# Altium PCB Pannelisation_sept2017.PcbDoc
Units mil, origin at the board's own origin, x right, y up, seen from the top; angles counter-clockwise.
Board outline 5545 x 5090 mil, 2 copper layers (Top Layer, Bottom Layer); 210 components, 0 nets, 636 pads, 139 vias.
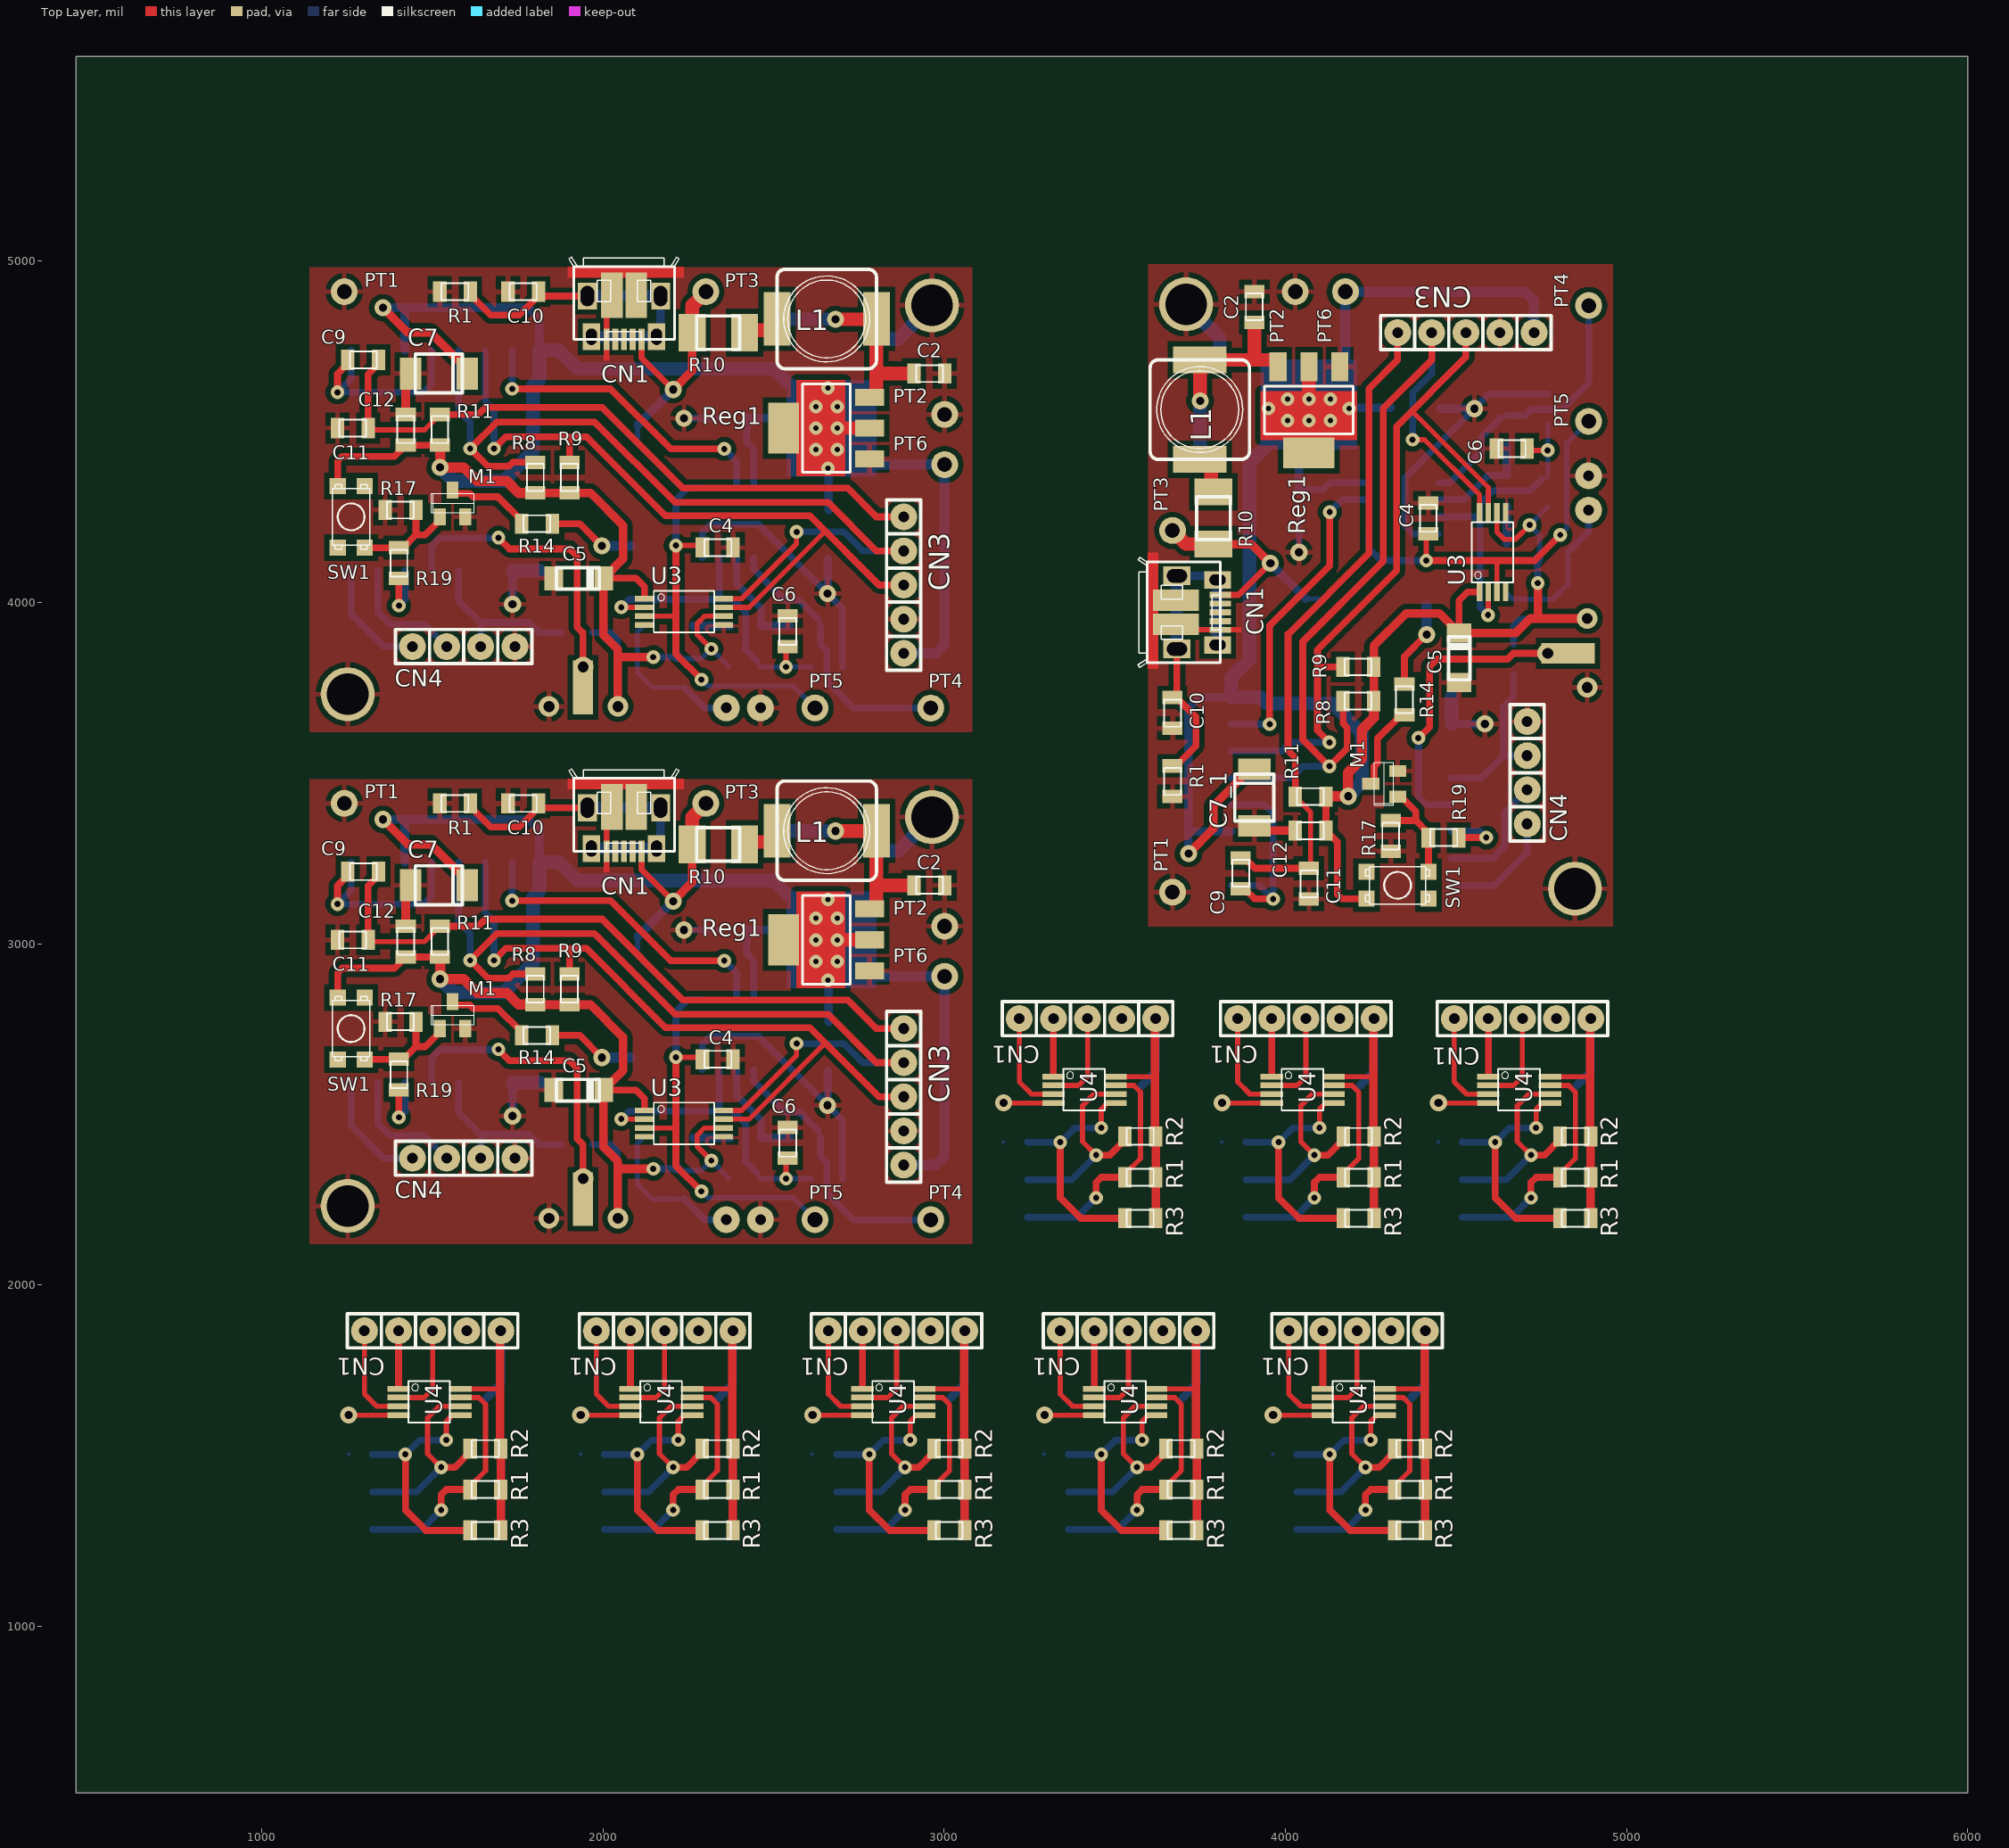
[diagram p0: Top Layer view]
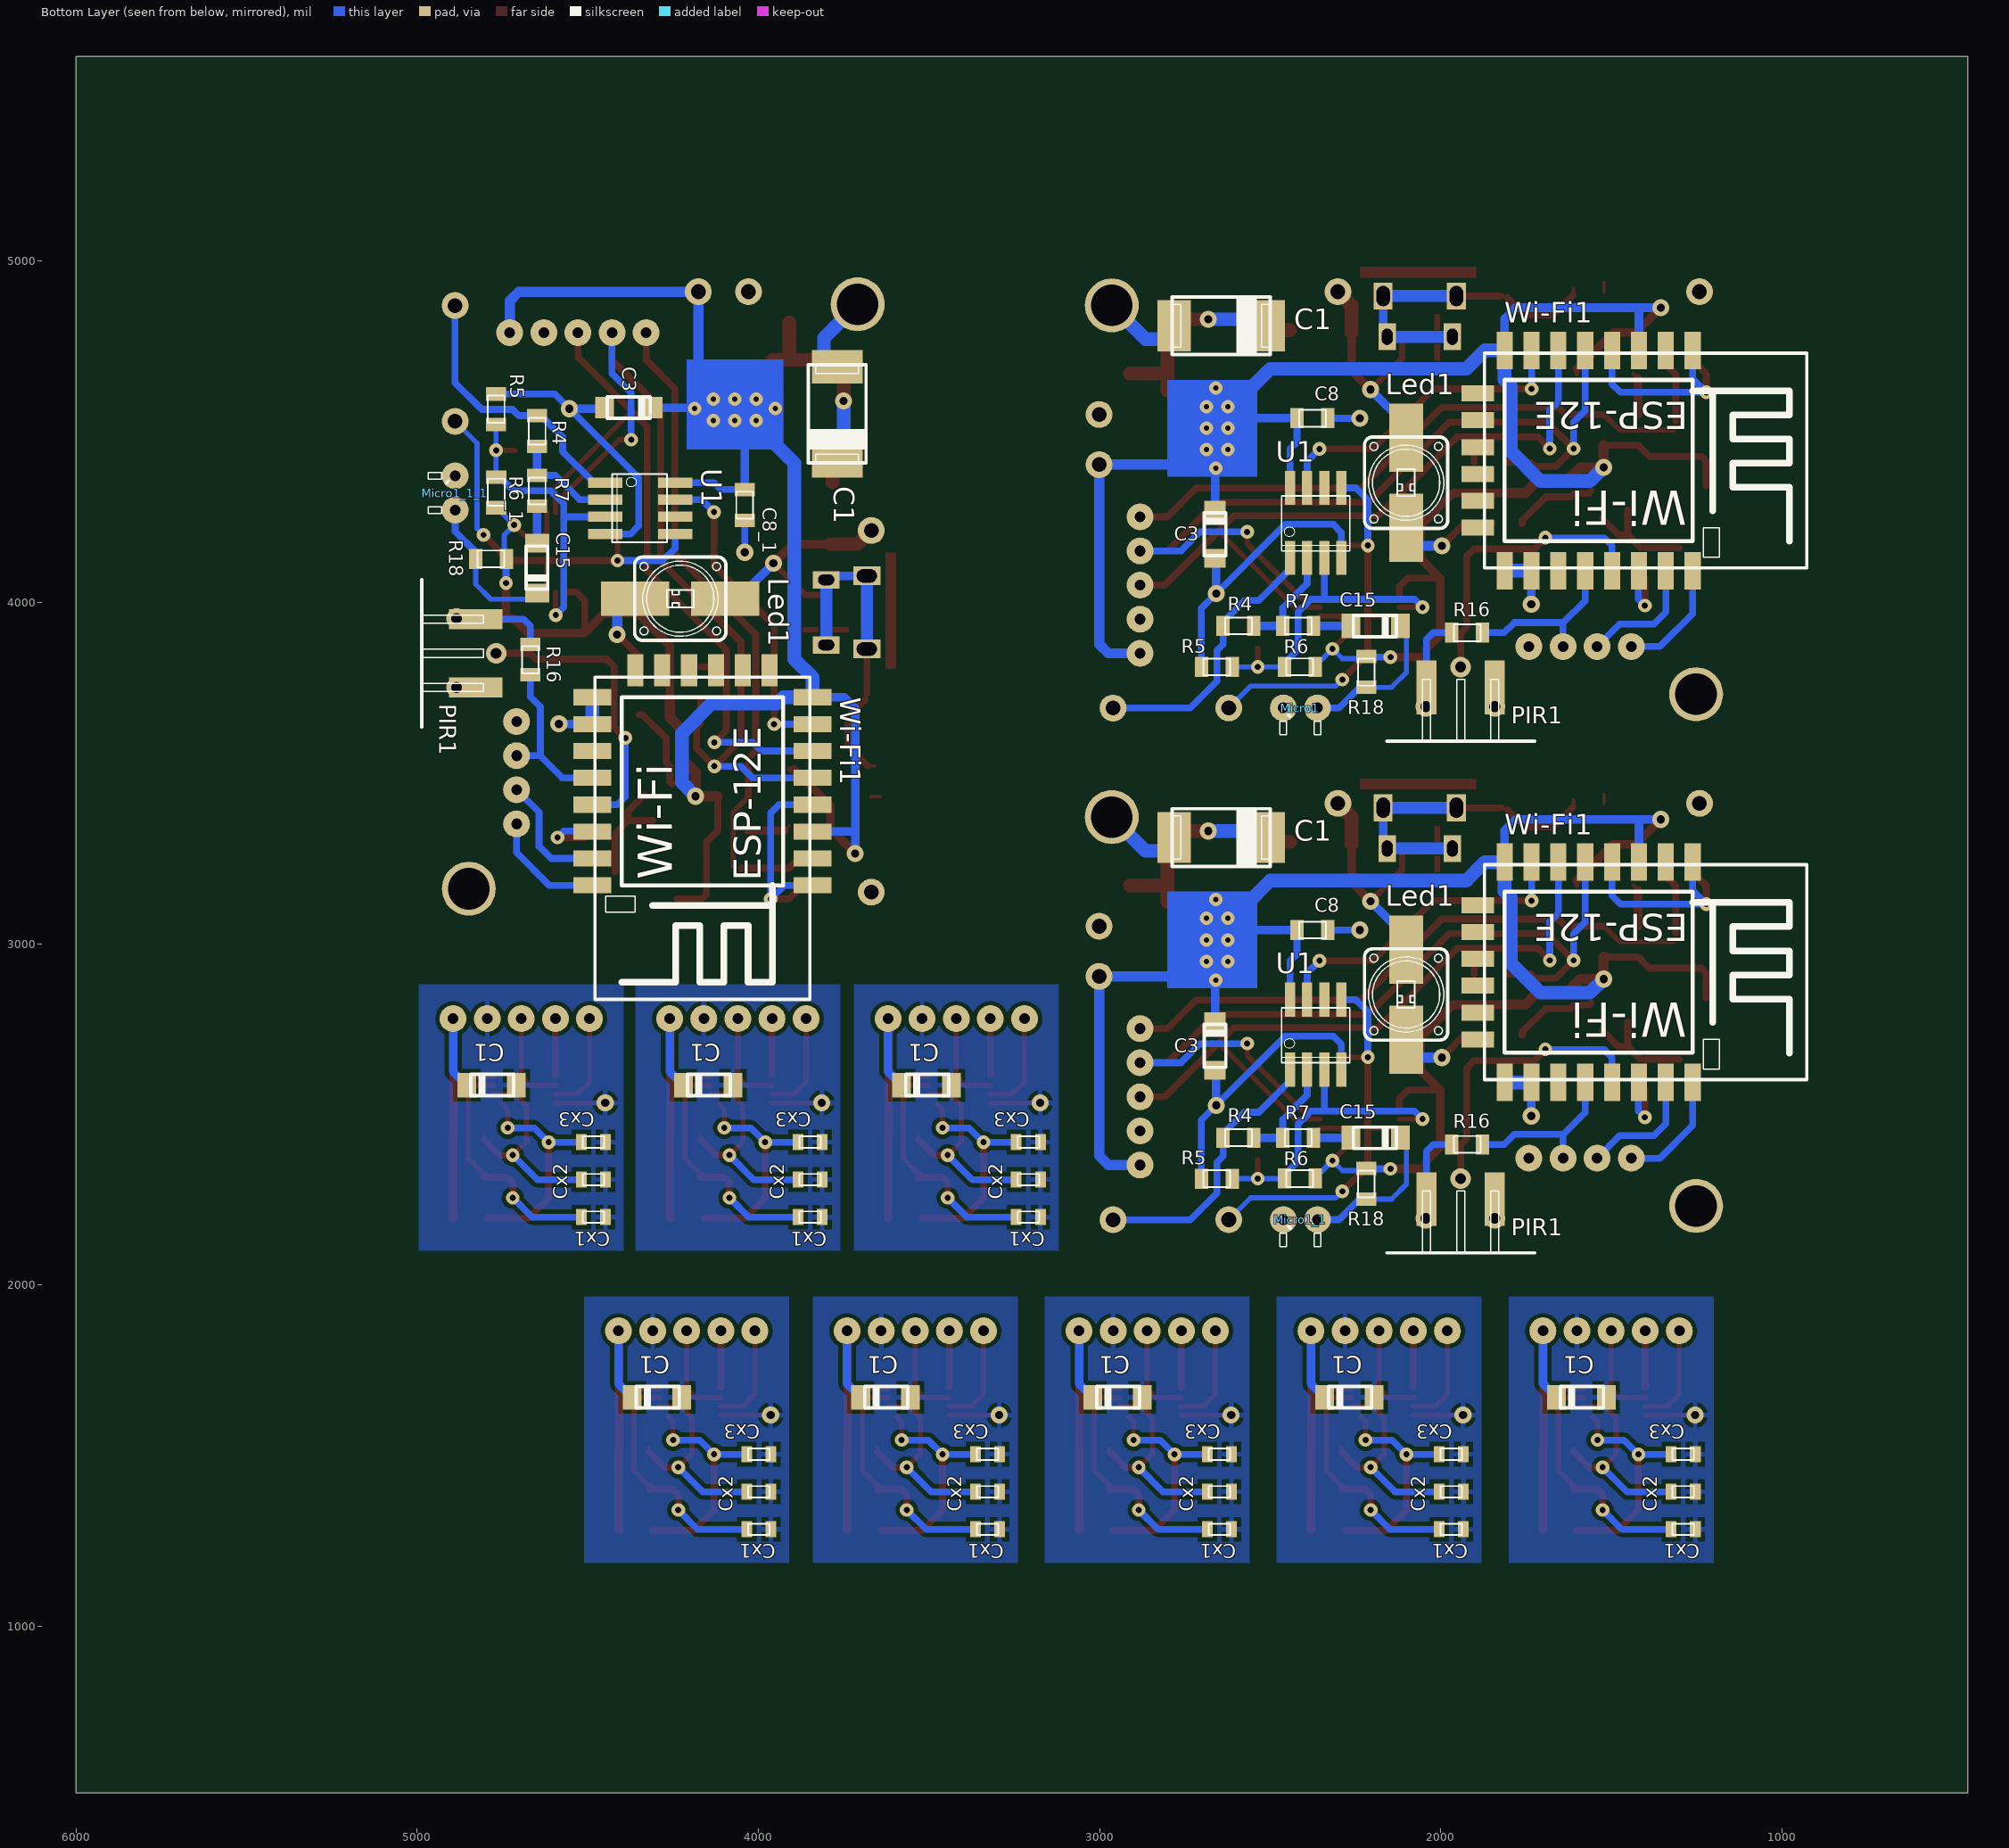
[diagram p1: Bottom Layer view, seen from below]

## Layer stack, top to bottom
Top Layer: signal copper 1.4
Dielectric: dielectric 12.6, FR-4, Dk 4.8
Bottom Layer: signal copper 1.4

## Board outline
455,510 455,5600 6000,5600 6000,510 455,510

## Design rules (kind name [scope] priority, off if disabled: settings)
Clearance [All] p1 off: gap=10
ComponentClearance [All] p1 off: gap=10 collisioncheckmode=3 verticalgap=10 showdistances=FALSE
Height [All] p1 off: minheight=0 maxheight=1000 prefheight=500
HoleSize [All] p1 off: absolutevalues=TRUE maxlimit=100 minlimit=1 maxpercent=80.000 minpercent=20.000
HoleToHoleClearance [All] p1 off: gap=10 allowstackedmicrovias=TRUE
LayerPairs [All] p1 off: enforce=TRUE
MinimumSolderMaskSliver [All] p1 off: minsoldermaskwidth=10
NetAntennae [All] p1 off: netantennaetolerance=0
PlaneClearance [All] p1 off: clearance=20
PlaneConnect [All] p1 off: planeconnectstyle=Relief reliefexpansion=20 reliefentries=4 reliefconductorwidth=10 reliefairgap=10
PolygonConnect [All] p1 off: connectstyle=Relief reliefconductorwidth=10 reliefentries=4 polygonreliefangle="90 Angle"
RoomDefinition SON_versept2017 [InComponentClass('SON_versept2017')] p1: confinementstyle=ConfineIn formatcopy=TRUE lockcomponents=FALSE outline 650,795 5550,795 5550,5319 650,5319
RoutingPriority [All] p1 off: routingpriority=0
RoutingTopology [All] p1 off: topology=Shortest
RoutingVias [All] p1 off: holewidth=28 width=50 viastyle="Through Hole" minholewidth=28 minwidth=50 maxholewidth=28 maxwidth=50
ShortCircuit [All] p1 off: allowed=FALSE
SilkscreenOverComponentPads [All] p1: minsilkscreentomaskgap=10
SolderMaskExpansion [All] p1 off: expansion=4
UnRoutedNet [All] p1 off:
Width [All] p1 off: maxlimit=10 minlimit=10 preferedwidth=10
14 further rules are at their usual default settings.

## Components (designator, comment, footprint, x,y, rotation, side; value= is the part's Value field where it differs from the comment)
C1 "1µF/16V" 3216-18 4220,2585 r180 bottom
C1 "1µF/16V" 3216-18 3580,2585 r180 bottom
C1 "1µF/16V" 3216-18 4855,2585 r180 bottom
C1 "1µF/16V" 3216-18 4370,1670 r180 bottom
C1 "1µF/16V" 3216-18 3020,1670 r180 bottom
C1 "1µF/16V" 3216-18 3700,1670 r180 bottom
C1 "1µF/16V" 3216-18 2340,1670 r180 bottom
C1 "1µF/16V" 3216-18 1660,1670 r180 bottom
C1 "220µF/16V" 7343-31 3769,4671 r270 bottom
C1 "220µF/16V" 7343-31 2761,3311 r180 bottom
C1 "220µF/16V" 7343-31 2761,4811 r180 bottom
C2 "100n" 0805 3909,4911 r270 top
C2 "100n" 0805 3001,3171 r180 top
C2 "100n" 0805 3001,4671 r180 top
C3 "10µF/16V" "Tantale 10µF/16V" 4309,4571 r180 bottom
C3 "10µF/16V" "Tantale 10µF/16V" 2661,2771 r90 bottom
C3 "10µF/16V" "Tantale 10µF/16V" 2661,4271 r90 bottom
C4 "100n" 0805 4419,4291 r270 top
C4 "100n" 0805 2381,2661 r180 top
C4 "100n" 0805 2381,4161 r180 top
C5 "10µF/6V3 tantale" "Tantale 10µF/6V3" 4509,3911 r270 top
C5 "10µF/6V3 tantale" "Tantale 10µF/6V3" 2001,2571 r180 top
C5 "10µF/6V3 tantale" "Tantale 10µF/6V3" 2001,4071 r180 top
C6 "10n" 0805 4709,4451 r180 top
C6 "10n" 0805 2541,2371 r90 top
C6 "10n" 0805 2541,3871 r90 top
C7 "47µF/10V tantale" "tantale 47µF/10V" 1601,3171 r180 top
C7 "47µF/10V tantale" "tantale 47µF/10V" 1601,4671 r180 top
C7_1 "47µF/10V tantale" "tantale 47µF/10V" 3909,3511 r270 top (schematic designator C7)
C8 "100n" 0805 2331,3040 r0 bottom
C8 "100n" 0805 2331,4540 r0 bottom
C8_1 "100n" 0805 4040,4241 r90 bottom (schematic designator C8)
C9 "100n" 0805 3869,3251 r270 top
C9 "100n" 0805 1341,3211 r180 top
C9 "100n" 0805 1341,4711 r180 top
C10 "100 n" 0805 3669,3631 r90 top
C10 "100 n" 0805 1721,3411 r0 top
C10 "100 n" 0805 1721,4911 r0 top
C11 "100n" 0805 4069,3131 r90 top
C11 "100n" 0805 1221,3011 r0 top
C11 "100n" 0805 1221,4511 r0 top
C12 "100n" 0805 4029,3331 r0 top
C12 "100n" 0805 1421,3051 r270 top
C12 "100n" 0805 1421,4551 r270 top
C15 "1µF/16V" 3216-18 4648.68,4027.68 r90 bottom
C15 "1µF/16V" 3216-18 2117.68,2431.32 r0 bottom
C15 "1µF/16V" 3216-18 2117.68,3931.32 r0 bottom
CN1 "inch_ligne 1x5" INCH_1x5_droit 4260,2780 r180 top
CN1 "inch_ligne 1x5" INCH_1x5_droit 3620,2780 r180 top
CN1 "inch_ligne 1x5" INCH_1x5_droit 4895,2780 r180 top
CN1 "inch_ligne 1x5" INCH_1x5_droit 4410,1865 r180 top
CN1 "inch_ligne 1x5" INCH_1x5_droit 3060,1865 r180 top
CN1 "inch_ligne 1x5" INCH_1x5_droit 3740,1865 r180 top
CN1 "inch_ligne 1x5" INCH_1x5_droit 2380,1865 r180 top
CN1 "inch_ligne 1x5" INCH_1x5_droit 1700,1865 r180 top
CN1 "USB Micro B" "USB Micro 714-2347" 3809,3971 r270 top
CN1 "USB Micro B" "USB Micro 714-2347" 2061,3271 r180 top
CN1 "USB Micro B" "USB Micro 714-2347" 2061,4771 r180 top
CN3 "inch_ligne 1x5" INCH_1x5_droit 4729,4791 r180 top
CN3 "inch_ligne 1x5" INCH_1x5_droit 2881,2351 r90 top
CN3 "inch_ligne 1x5" INCH_1x5_droit 2881,3851 r90 top
CN4 "inch_ligne 1x4" INCH_1x4_droit 4709,3351 r90 top
CN4 "inch_ligne 1x4" INCH_1x4_droit 1441,2371 r0 top
CN4 "inch_ligne 1x4" INCH_1x4_droit 1441,3871 r0 top
Cx1 "PONT" 0603 3880,2215 r180 bottom
Cx1 "PONT" 0603 3240,2215 r180 bottom
Cx1 "PONT" 0603 4515,2215 r180 bottom
Cx1 "PONT" 0603 4030,1300 r180 bottom
Cx1 "PONT" 0603 2680,1300 r180 bottom
Cx1 "PONT" 0603 3360,1300 r180 bottom
Cx1 "PONT" 0603 2000,1300 r180 bottom
Cx1 "PONT" 0603 1320,1300 r180 bottom
Cx2 "PONT" 0603 3880,2325 r180 bottom
Cx2 "PONT" 0603 3240,2325 r180 bottom
Cx2 "PONT" 0603 4515,2325 r180 bottom
Cx2 "PONT" 0603 4030,1410 r180 bottom
Cx2 "PONT" 0603 2680,1410 r180 bottom
Cx2 "PONT" 0603 3360,1410 r180 bottom
Cx2 "PONT" 0603 2000,1410 r180 bottom
Cx2 "PONT" 0603 1320,1410 r180 bottom
Cx3 "PONT" 0603 3880,2435 r180 bottom
Cx3 "PONT" 0603 3240,2435 r180 bottom
Cx3 "PONT" 0603 4515,2435 r180 bottom
Cx3 "PONT" 0603 4030,1520 r180 bottom
Cx3 "PONT" 0603 2680,1520 r180 bottom
Cx3 "PONT" 0603 3360,1520 r180 bottom
Cx3 "PONT" 0603 2000,1520 r180 bottom
Cx3 "PONT" 0603 1320,1520 r180 bottom
L1 "100µH CD74R series" "SELF CD74R" 3749,4711 r90 top
L1 "100µH CD74R series" "SELF CD74R" 2801,3331 r0 top
L1 "100µH CD74R series" "SELF CD74R" 2801,4831 r0 top
Led1 "LTW5AM" LTW5AM 4229,4011 r0 bottom
Led1 "LTW5AM" LTW5AM 2101,2851 r270 bottom
Led1 "LTW5AM" LTW5AM 2101,4351 r270 bottom
M1 "NTR4501N" "SOT23 (NTR4501)" 4329,3431 r90 top
M1 "NTR4501N" "SOT23 (NTR4501)" 1521,2751 r0 top
M1 "NTR4501N" "SOT23 (NTR4501)" 1521,4251 r0 top
Micro1 "Electret" "Micro_electret simple" 2361,3691 r180 bottom
Micro1_1 "Electret" "Micro_electret simple" 2361,2191 r180 bottom (schematic designator Micro1)
Micro1_1_1 "Electret" "Micro_electret simple" 4889,4271 r270 bottom (schematic designator Micro1)
PIR1 "PIR_WL" PIR_WL_footprint 4829,3951 r270 bottom
PIR1 "PIR_WL" PIR_WL_footprint 2041,2251 r180 bottom
PIR1 "PIR_WL" PIR_WL_footprint 2041,3751 r180 bottom
PT1 "GND" "PTEST boucle"#1 3669,3151 r90 top
PT1 "GND" "PTEST boucle"#1 1241,3411 r0 top
PT1 "GND" "PTEST boucle"#1 1241,4911 r0 top
PT2 "GND" "PTEST boucle"#1 4029,4911 r90 top
PT2 "GND" "PTEST boucle"#1 3001,3051 r0 top
PT2 "GND" "PTEST boucle"#1 3001,4551 r0 top
PT3 "+5V" "PTEST boucle"#1 3669,4211 r90 top
PT3 "+5V" "PTEST boucle"#1 2301,3411 r0 top
PT3 "+5V" "PTEST boucle"#1 2301,4911 r0 top
PT4 "Son" "PTEST boucle"#2 4889,4871 r90 top
PT4 "Son" "PTEST boucle"#2 2961,2191 r0 top
PT4 "Son" "PTEST boucle"#2 2961,3691 r0 top
PT5 "Seuil" "PTEST boucle"#1 4889,4531 r90 top
PT5 "Seuil" "PTEST boucle"#1 2621,2191 r0 top
PT5 "Seuil" "PTEST boucle"#1 2621,3691 r0 top
PT6 "+3V3" "PTEST boucle"#3 4169,4911 r90 top
PT6 "+3V3" "PTEST boucle"#3 3001,2911 r0 top
PT6 "+3V3" "PTEST boucle"#3 3001,4411 r0 top
R1 "10K" 0805 4170,2315 r0 top
R1 "10K" 0805 3530,2315 r0 top
R1 "10K" 0805 4805,2315 r0 top
R1 "10K" 0805 4320,1400 r0 top
R1 "10K" 0805 2970,1400 r0 top
R1 "10K" 0805 3650,1400 r0 top
R1 "10K" 0805 2290,1400 r0 top
R1 "10K" 0805 1610,1400 r0 top
R1 "100K" 0805 3669,3431 r90 top
R1 "100K" 0805 1521,3411 r0 top
R1 "100K" 0805 1521,4911 r0 top
R2 "10K" 0805 4170,2435 r0 top
R2 "10K" 0805 3530,2435 r0 top
R2 "10K" 0805 4805,2435 r0 top
R2 "10K" 0805 4320,1520 r0 top
R2 "10K" 0805 2970,1520 r0 top
R2 "10K" 0805 3650,1520 r0 top
R2 "10K" 0805 2290,1520 r0 top
R2 "10K" 0805 1610,1520 r0 top
R3 "10K" 0805 4170,2195 r0 top
R3 "10K" 0805 3530,2195 r0 top
R3 "10K" 0805 4805,2195 r0 top
R3 "10K" 0805 4320,1280 r0 top
R3 "10K" 0805 2970,1280 r0 top
R3 "10K" 0805 3650,1280 r0 top
R3 "10K" 0805 2290,1280 r0 top
R3 "10K" 0805 1610,1280 r0 top
R4 "100K" 0805 4648.68,4457.68 r90 bottom
R4 "100K" 0805 2547.68,2431.32 r0 bottom
R4 "100K" 0805 2547.68,3931.32 r0 bottom
R5 "10K" 0805 4769,4611 r270 bottom
R5 "10K" 0805 2701,2311 r180 bottom
R5 "10K" 0805 2701,3811 r180 bottom
R6 "10K" 0805 2457.68,2311.32 r180 bottom
R6 "10K" 0805 2457.68,3811.32 r180 bottom
R6_1 "10K" 0805 4768.68,4367.68 r270 bottom (schematic designator R6)
R7 "1K" 0805 4648.68,4282.68 r90 bottom
R7 "1K" 0805 2372.68,2431.32 r0 bottom
R7 "1K" 0805 2372.68,3931.32 r0 bottom
R8 "10K" 0805 4169,3711 r0 top
R8 "10K" 0805 1801,2911 r270 top
R8 "10K" 0805 1801,4411 r270 top
R9 "10K" 0805 4169,3811 r0 top
R9 "10K" 0805 1901,2911 r270 top
R9 "10K" 0805 1901,4411 r270 top
R10 "0R33" 1210 3789,4171 r90 top
R10 "0R33" 1210 2261,3291 r0 top
R10 "0R33" 1210 2261,4791 r0 top
R11 "4K7" 0805 4029,3431 r0 top
R11 "4K7" 0805 1521,3051 r270 top
R11 "4K7" 0805 1521,4551 r270 top
R14 "68" 0805 4349,3671 r90 top
R14 "68" 0805 1761,2731 r0 top
R14 "68" 0805 1761,4231 r0 top
R16 "10K" 0805 4668.68,3787.68 r90 bottom
R16 "10K" 0805 1877.68,2411.32 r0 bottom
R16 "10K" 0805 1877.68,3911.32 r0 bottom
R17 "15K" 0805 4309,3271 r90 top
R17 "15K" 0805 1361,2771 r0 top
R17 "15K" 0805 1361,4271 r0 top
R18 "2K" 0805 4828.68,4127.68 r180 bottom
R18 "2K" 0805 2217.68,2251.32 r90 bottom
R18 "2K" 0805 2217.68,3751.32 r90 bottom
R19 "470" 0805 4509,3311 r180 top
R19 "470" 0805 1401,2571 r90 top
R19 "470" 0805 1401,4071 r90 top
Reg1 "LM1117/33" "SOT-223 thermo1" 4069,4691 r180 top
Reg1 "LM1117/33" "SOT-223 thermo1" 2781,3011 r90 top
Reg1 "LM1117/33" "SOT-223 thermo1" 2781,4511 r90 top
SW1 "KMR 4" "µSwitch KMR4" 4329,3171 r180 top
SW1 "KMR 4" "µSwitch KMR4" 1261,2751 r90 top
SW1 "KMR 4" "µSwitch KMR4" 1261,4251 r90 top
U1 "AD8052" SOIC08 4449,4351 r180 bottom
U1 "AD8052" SOIC08 2441,2631 r90 bottom
U1 "AD8052" SOIC08 2441,4131 r90 bottom
U3 "MCP47FEB21" TSSOP_8 4569,4031 r90 top
U3 "MCP47FEB21" TSSOP_8 2121,2511 r0 top
U3 "MCP47FEB21" TSSOP_8 2121,4011 r0 top
U4 "MCP9808" MSOP-08 3960,2610 r0 top
U4 "MCP9808" MSOP-08 3320,2610 r0 top
U4 "MCP9808" MSOP-08 4595,2610 r0 top
U4 "MCP9808" MSOP-08 4110,1695 r0 top
U4 "MCP9808" MSOP-08 2760,1695 r0 top
U4 "MCP9808" MSOP-08 3440,1695 r0 top
U4 "MCP9808" MSOP-08 2080,1695 r0 top
U4 "MCP9808" MSOP-08 1400,1695 r0 top
Wi-Fi1 "ESP-12E" ESP-12E 3849,3171 r0 bottom
Wi-Fi1 "ESP-12E" ESP-12E 1261,3231 r270 bottom
Wi-Fi1 "ESP-12E" ESP-12E 1261,4731 r270 bottom

## Footprints (in the part's own frame and the unit in brackets; to place one, negate y for a bottom-side part, rotate by r counter-clockwise, add the part's x,y. Pads: shape width x height; smd on the part's side, far side on the other; paste and mask are expansions set on the pad)
0603 [mm] "résistance CMS"
  rect 0.8x1.2 smd: 1(-0.1,-0.425) 2(1.7,-0.425)
  silkscreen extent 0,-0.85 1.6,0
0805 [mm] "résistance CMS"
  rect 1x1.5 smd: 1(0,0) 2(2.286,0)
  silkscreen extent 0.13,-0.63 2.13,0.63
1210 [mm] "résistance CMS 0,5W ERJ14B"
  rect 2x2.8 smd: 1(0,0) 2(3.9,0)
  silkscreen extent 0.33,-1.26 3.53,1.24
3216-18 [mm] "condensateur tantale CMS (3,2 x 1,6 x 1,6)"
  rect 1.4x1.8 smd: 1(0,0) 2(3.7,0)
  silkscreen extent 0.3,-0.79 3.5,0.81
7343-31 [mm] "condensateur tantale CMS (7,3 x 4,3 x 3,0)"
  rect 2.5x3.8 smd: 1(6.5,0) 2(-0.5,0)
  silkscreen extent -0.65,-2.15 6.65,2.15
ESP-12E [mm] "module Wi-Fi"
  rect 2.8x1.2 smd: 1(-0.2,0) 2(-0.2,-2) 3(-0.2,-4) 4(-0.2,-6) 5(-0.2,-8) 6(-0.2,-10) 7(-0.2,-12) 8(-0.2,-14) 15(16.2,-14) 16(16.2,-12) 17(16.2,-10) 18(16.2,-8) 19(16.2,-6) 20(16.2,-4) 21(16.2,-2) 22(16.2,0)
  rect 1.2x2.4 smd: 9(3,-16) 10(5,-16) 11(7,-16) 12(9,-16) 13(11,-16) 14(13,-16)
  silkscreen extent 0,-15.5 16,8.5
INCH_1x4_droit [mm] "simple rangée 2,54 mm"
  round 2 hole 0.8: 1(0,0) 2(2.54,0) 3(5.08,0) 4(7.62,0)
  silkscreen extent -1.27,-1.27 8.89,1.27
INCH_1x5_droit [mm] "simple rangée 2,54 mm"
  round 2 hole 0.8: 1(0,0) 2(2.54,0) 3(5.08,0) 4(7.62,0) 5(10.16,0)
  silkscreen extent -1.27,-1.27 11.43,1.27
LTW5AM [mil] "LED golden dragon"
  rect 200x100 smd: 1(-132,0) 2(132,0)
  silkscreen extent -134,-122 134,122
"Micro_electret simple" [mm] "Microphone coudé sur PCB sans sérigraphie"
  round 2 hole 0.8: 0(-2.54,0) 1(0,0)
  silkscreen extent -2.79,-2 0.25,-0.51
MSOP-08 [mil] "boîtier DGK"
  rect 66x17 smd: 1(0,0) 2(0,-25.59) 3(0,-51.18) 4(0,-76.77) 5(181.1,-76.77) 6(181.1,-51.18) 7(181.1,-25.59) 8(181.1,0)
  silkscreen extent 29,-99 151,23
PIR_WL_footprint [mm] "empreintes seules"
  rect 1.5x4 smd: 1(0,0) 3(5.08,0)
  rect 1.5x4 smd far side: 2(2.54,0)
  silkscreen extent -2.96,-4 8.04,0.6
"PTEST boucle"#1 [mm] "RS 262-2179"
  round 2 hole 1.1: 1(0,0)
"PTEST boucle"#2 [mm] "RS 262-2179"
  round 2 hole 1.1: 1(-0.017,-0.008)
"PTEST boucle"#3 [mm] "RS 262-2179"
  round 2 hole 1.1: 1(0,-0.178)
"SELF CD74R" [mm] "Self 7,4 x 7,4"
  rect 2x4 smd: 1(0,0) 2(-7.4,0)
  silkscreen extent -7.4,-3.7 0,3.7
SOIC08 [mil]
  rect 100x30 smd: 1(0,0) 2(0,-50) 3(0,-100) 4(0,-150) 5(205,-150) 6(205,-100) 7(205,-50) 8(205,0)
  silkscreen extent 20,-175 181,25
"SOT23 (NTR4501)" [mil] "D->1 G->2 S->3"
  rect 35x50 smd: 1(37.4,78.74) 2(0,0) 3(74.8,0)
  silkscreen extent -25,12 100,68
"SOT-223 thermo1" [mm] "empreinte pour SOT-223"
  rect 1.27x2.15 smd: 1(-2.3,0) 2(0,0) 3(2.3,0)
  rect 3.81x2.286 smd: 2(0,6.4)
  Top Layer region: -3.6,1.8 3.6,1.8 3.6,5.461 -3.6,5.461
  Bottom Layer region: -3.602,-0.531 3.598,-0.531 3.598,6.175 -3.602,6.175
  silkscreen extent -3.3,1.45 3.3,5
"Tantale 10µF/6V3" [mm] "1206 ou 3216-18 (175-4041)"
  rect 1.4x1.8 smd: 1(0,0) 2(3.7,0)
  silkscreen extent 0.3,-0.79 3.5,0.81
"Tantale 10µF/16V" [mm] "1206 ou 3216-18 (145-7461)"
  rect 1.4x1.6 smd: 1(0,0) 2(-3.6,0)
  silkscreen extent -3.4,-0.81 -0.2,0.8
"tantale 47µF/10V" [mm] "1210 ou 3528-21 (175-4168)"
  rect 1.6x2.4 smd: 1(0,0) 2(4.2,0)
  silkscreen extent 0.36,-1.45 3.86,1.45
TSSOP_8 [mm]
  rect 1.4x0.42 smd: 1(0,0) 2(0,-0.65) 3(0,-1.3) 4(0,-1.95) 5(5.9,-1.95) 6(5.9,-1.3) 7(5.9,-0.65) 8(5.9,0)
  silkscreen extent 0.7,-2.51 5.2,0.58
"USB Micro 714-2347" [mm] "empreinte pour micro USB RS 714-2347"
  rect 0.45x1.6 smd: 1(-1.3,0) 2(-0.65,0) 3(0,0) 4(0.65,0) 5(1.3,0)
  rect 1.3x2 hole 0.8 slot 1.2 at 90 deg: 6(-2.425,-0.2) 7(2.425,-0.2)
  rect 1.4x2 hole 1 slot 1.5 at 90 deg: 8(-2.725,-3.23) 9(2.725,-3.23)
  rect 1.6x3.4 smd: 10(-0.9,-3.3) 11(0.9,-3.3)
  silkscreen extent -4.1,-6.12 4.1,0
"µSwitch KMR4" [mm] "µSwitch KMR 4"
  rect 1.2x1.2 smd: 1(-2.3,1) 2(2.3,1) 3(-2.3,-1) 4(2.3,-1)
  silkscreen extent -2.4,-1.4 2.4,1.4

## Part data
C1 C1 C1 C1 C1 C1 C1 C1 C15 C15 C15: library part "tantale 1µF/16V", "145-7406 case 3216-18"
C1 C1 C1: library part "tantale 220µF/16V", "253-5290 case 7343-31"
C2 C2 C2 C4 C4 C4 C6 C6 C6 C8 C8 C8_1 C9 C9 C9 C10 C10 C10 C11 C11 C11 C12 C12 C12: library part Cap_CMS_0805, "CMS 0805"
C3 C3 C3: library part "tantale 10µF/16V", "145-7461 case 3216-18"
C5 C5 C5: library part "tantale 10µF/6V3", "175-4041 ou 145-7412 case 3216-18"
C7 C7 C7_1: library part "tantale 47µF/10V", "175-4168"
CN1 CN1 CN1 CN1 CN1 CN1 CN1 CN1 CN3 CN3 CN3: library part Inch_1x5_droit, "Inch_1x5_droit"
CN1 CN1 CN1: "Amphenol 714-2347"
CN4 CN4 CN4: library part Inch_1x4_droit, "Inch_1x4_droit"
Cx1 Cx1 Cx1 Cx1 Cx1 Cx1 Cx1 Cx1 Cx2 Cx2 Cx2 Cx2 Cx2 Cx2 Cx2 Cx2 Cx3 Cx3 Cx3 Cx3 Cx3 Cx3 Cx3 Cx3: library part "Pont 0603", "Pont pour configuration I2C"
L1 L1 L1: library part "Self CD74R", "SMT CD74R Aliexpress"
Led1 Led1 Led1: library part "LTW5AM LED", "LED Golden Dragon Plus"
M1 M1 M1: "MOSFET canal N"
Micro1 Micro1_1 Micro1_1_1: library part Microphone_03, "Microphone électret"
PIR1 PIR1 PIR1: library part PIR_01, "Détecteur infrarouge"
PT1 PT1 PT1 PT2 PT2 PT2 PT3 PT3 PT3 PT4 PT4 PT4 PT5 PT5 PT5 PT6 PT6 PT6: library part "PTEST boucle", "pointe de test CI 262-2179"
R1 R1 R1 R1 R1 R1 R1 R1 R1 R1 R1 R2 R2 R2 R2 R2 R2 R2 R2 R3 R3 R3 R3 R3 R3 R3 R3 R4 R4 R4 R5 R5 R5 R6 R6 R6_1 R7 R7 R7 R8 R8 R8 R9 R9 R9 R11 R11 R11 R14 R14 R14 R16 R16 R16 R17 R17 R17 R18 R18 R18 R19 R19 R19: library part "Res CMS 0805", "CMS 0805"
R10 R10 R10: library part "Res CMS 1210 ERJ14B", "CMS 1210"
Reg1 Reg1 Reg1: library part LM1117MPX-3.3, "Régulateur SOT-223"
SW1 SW1 SW1: library part µSwitch, "KMR 4 Series 793-1605"
U1 U1 U1: "AOP"
U3 U3 U3: "DAC I2C (RS : 879-3261)"
U4 U4 U4 U4 U4 U4 U4 U4: "Digital temperature Sensor"
Wi-Fi1 Wi-Fi1 Wi-Fi1: "ESP-12E module Wi-Fi"

## Free pads (board coordinates)
  round 158 hole 122: 1(1251,2231) 1(1251,3731) 1(4849,3161) 2(2964,3371) 2(2964,4871) 2(3709,4874)

## Via types
v1: diameter 40, hole 18, Top Layer to Bottom Layer, 74 vias
v2: diameter 50, hole 24, Top Layer to Bottom Layer, 32 vias
v3: diameter 39.37, hole 15.75, Top Layer to Bottom Layer, 24 vias
v4: diameter 60, hole 32, Top Layer to Bottom Layer, 9 vias

## Nets (pads, with @x,y where several pads share a name; then routed paths per layer and width w, separated by ;. In a path a pad name is that pad's centre, name@x,y a point inside that pad or via, vN(x,y) a via of type N, cw(c..) or ccw(c..) an arc to the next point about the centre after c; other vN are vias at no path point)
pads on no net: C1.1 C1.2 C2.1 C2.2 C3.1 C3.2 C4.1 C4.2 C5.1 C5.2 C6.1 C6.2 C7.1 C7.2 C7_1.1 C7_1.2 C8.1 C8.2 C8_1.1 C8_1.2 C9.1 C9.2 C10.1 C10.2 C11.1 C11.2 C12.1 C12.2 C15.1 C15.2 CN1.1 CN1.2 CN1.3 CN1.4 CN1.5 CN1.6 CN1.7 CN1.8 CN1.9 CN1.10 CN1.11 CN3.1 CN3.2 CN3.3 CN3.4 CN3.5 CN4.1 CN4.2 CN4.3 CN4.4 Cx1.1 Cx1.2 Cx2.1 Cx2.2 Cx3.1 Cx3.2 L1.1 L1.2 Led1.1 Led1.2 M1.1 M1.2 M1.3 Micro1.0 Micro1.1 Micro1_1.0 Micro1_1.1 Micro1_1_1.0 Micro1_1_1.1 PIR1.1 PIR1.2 PIR1.3 PT1.1 PT2.1 PT3.1 PT4.1 PT5.1 PT6.1 R1.1 R1.2 R2.1 R2.2 R3.1 R3.2 R4.1 R4.2 R5.1 R5.2 R6.1 R6.2 R6_1.1 R6_1.2 R7.1 R7.2 R8.1 R8.2 R9.1 R9.2 R10.1 R10.2 R11.1 R11.2 R14.1 R14.2 R16.1 R16.2 R17.1 R17.2 R18.1 R18.2 R19.1 R19.2 Reg1.1 Reg1.2 Reg1.3 SW1.1 SW1.2 SW1.3 SW1.4 U1.1 U1.2 U1.3 U1.4 U1.5 U1.6 U1.7 U1.8 U3.1 U3.2 U3.3 U3.4 U3.5 U3.6 U3.7 U3.8 U4.1 U4.2 U4.3 U4.4 U4.5 U4.6 U4.7 U4.8 Wi-Fi1.1 Wi-Fi1.2 Wi-Fi1.3 Wi-Fi1.4 Wi-Fi1.5 Wi-Fi1.6 Wi-Fi1.7 Wi-Fi1.8 Wi-Fi1.9 Wi-Fi1.10 Wi-Fi1.11 Wi-Fi1.12 Wi-Fi1.13 Wi-Fi1.14 Wi-Fi1.15 Wi-Fi1.16 Wi-Fi1.17 Wi-Fi1.18 Wi-Fi1.19 Wi-Fi1.20 Wi-Fi1.21 Wi-Fi1.22
copper on no net: | length 106781
  Top Layer w10: 1399.77,1618 1400,1618.23 ; 1421,3156.35 1435.65,3171 ; 1421,4656.35 1435.65,4671 ; 1521,3411 1521,3437 ; 1521,4911 1521,4937 ; 1610,1510 1610,1520 ; 1611,3401 1611,3411 1611,3421 ; 1611,4901 1611,4911 1611,4921 ; 1690,1280 1690,1285 ; 2079.77,1618 2080,1618.23 ; 2290,1510 2290,1520 ; 2370,1280 2370,1285 ; 2759.77,1618 2760,1618.23 ; 2801,3331 2803.09,3328.91 ; 2801,4831 2803.09,4828.91 ; 2970,1510 2970,1520 ; 3050,1280 3050,1285 ; 3319.77,2533 3320,2533.23 ; 3439.77,1618 3440,1618.23 ; 3530,2425 3530,2435 ; 3610,2195 3610,2200 ; 3643,3431 3669,3431 ; 3650,1510 3650,1520 ; 3659,3521 3669,3521 3679,3521 ; 3730,1280 3730,1285 ; 3749,4711 3751.09,4713.09 ; 3909,3345.65 3923.65,3331 ; 3959.77,2533 3960,2533.23 ; 4109.77,1618 4110,1618.23 ; 4170,2425 4170,2435 ; 4250,2195 4250,2200 ; 4320,1510 4320,1520 ; 4400,1280 4400,1285 ; 4594.77,2533 4595,2533.23 ; 4805,2425 4805,2435 ; 4885,2195 4885,2200
  Top Layer w15: v2(1254,1618) 1399.77,1618 ; 1300,1865 1300,1680 1336.18,1643.82 1400,1643.82 ; 1316,3006 1476,3006 1521,3051 ; 1316,4506 1476,4506 1521,4551 ; 1400,1669.41 1474.41,1669.41 1500,1695 1500,1865 ; v1(1525,1465) 1485,1505 1485,1610 1518.82,1643.82 1581.1,1643.82 ; v1(1540,1545) 1540,1600 1555,1615 ; 1581.1,1669.41 1635.59,1669.41 1655,1650 1655,1455 1610,1410 ; 1581.1,1695 1688,1695 ; 1601,3171 1601,3184 ; 1601,4671 1601,4684 ; v2(1934,1618) 2079.77,1618 ; 1980,1865 1980,1680 2016.18,1643.82 2080,1643.82 ; v1@2053.59,2485.41 2121,2485.41 ; v1@2053.59,3985.41 2121,3985.41 ; 2080,1669.41 2154.41,1669.41 2180,1695 2180,1865 ; 2121,2459.82 2213,2459.82 ; 2121,3959.82 2213,3959.82 ; v1(2205,1465) 2165,1505 2165,1610 2198.82,1643.82 2261.1,1643.82 ; v1(2213,2667) 2285,2667 ; v1(2213,4167) 2285,4167 ; v1(2220,1545) 2220,1600 2235,1615 ; 2261.1,1669.41 2315.59,1669.41 2335,1650 2335,1455 2290,1410 ; 2261.1,1695 2368,1695 ; v1@2306,2364 v1@2311,2369 ; v1@2306,3864 v1@2311,3869 ; v1@2315,2373 v1@2311,2369 ; v1@2315,3873 v1@2311,3869 ; v1@2316.5,2363.5 v1@2311,2369 ; v1@2316.5,3863.5 v1@2311,3869 ; v1(2317,2364) 2275,2406 2275,2438 2296.82,2459.82 2353.28,2459.82 ; v1(2317,3864) 2275,3906 2275,3938 2296.82,3959.82 2353.28,3959.82 ; 2353.28,2485.41 2427.41,2485.41 2651,2709 ; 2353.28,2511 2406,2511 2567,2672 v1(2567,2707) ; 2353.28,3985.41 2427.41,3985.41 2651,4209 ; 2353.28,4011 2406,4011 2567,4172 v1(2567,4207) ; v1(2536,2311) 2536,2366 ; v1(2536,3811) 2536,3866 ; v2(2614,1618) 2759.77,1618 ; 2660,1865 2660,1680 2696.18,1643.82 2760,1643.82 ; 2760,1669.41 2834.41,1669.41 2860,1695 2860,1865 ; v1(2885,1465) 2845,1505 2845,1610 2878.82,1643.82 2941.1,1643.82 ; v1(2900,1545) 2900,1600 2915,1615 ; 2941.1,1669.41 2995.59,1669.41 3015,1650 3015,1455 2970,1410 ; 2941.1,1695 3048,1695 ; v2(3174,2533) 3319.77,2533 ; 3220,2780 3220,2595 3256.18,2558.82 3320,2558.82 ; v2(3294,1618) 3439.77,1618 ; 3320,2584.41 3394.41,2584.41 3420,2610 3420,2780 ; 3340,1865 3340,1680 3376.18,1643.82 3440,1643.82 ; 3440,1669.41 3514.41,1669.41 3540,1695 3540,1865 ; v1(3445,2380) 3405,2420 3405,2525 3438.82,2558.82 3501.1,2558.82 ; v1(3460,2460) 3460,2515 3475,2530 ; 3501.1,2584.41 3555.59,2584.41 3575,2565 3575,2370 3530,2325 ; 3501.1,2610 3608,2610 ; v1(3565,1465) 3525,1505 3525,1610 3558.82,1643.82 3621.1,1643.82 ; v1(3580,1545) 3580,1600 3595,1615 ; 3621.1,1669.41 3675.59,1669.41 3695,1650 3695,1455 3650,1410 ; 3621.1,1695 3728,1695 ; v2(3814,2533) 3959.77,2533 ; 3860,2780 3860,2595 3896.18,2558.82 3960,2558.82 ; 3896,3511 3909,3511 ; 3960,2584.41 4034.41,2584.41 4060,2610 4060,2780 ; v2(3964,1618) 4109.77,1618 ; 4010,1865 4010,1680 4046.18,1643.82 4110,1643.82 ; 4029,3431 4074,3386 4074,3226 ; v1(4085,2380) 4045,2420 4045,2525 4078.82,2558.82 4141.1,2558.82 ; v1(4100,2460) 4100,2515 4115,2530 ; 4110,1669.41 4184.41,1669.41 4210,1695 4210,1865 ; 4141.1,2584.41 4195.59,2584.41 4215,2565 4215,2370 4170,2325 ; 4141.1,2610 4248,2610 ; v1(4235,1465) 4195,1505 4195,1610 4228.82,1643.82 4291.1,1643.82 ; v1(4250,1545) 4250,1600 4265,1615 ; 4291.1,1669.41 4345.59,1669.41 4365,1650 4365,1455 4320,1410 ; 4291.1,1695 4398,1695 ; 4371,4561 4594.59,4337.41 4594.59,4263.28 ; v1(4373,4477) 4408,4477 4569,4316 4569,4263.28 ; v1(4413,4123) 4413,4195 ; v2(4449,2533) 4594.77,2533 ; 4495,2780 4495,2595 4531.18,2558.82 4595,2558.82 ; v1@4594.59,3963.59 4594.59,4031 ; 4595,2584.41 4669.41,2584.41 4695,2610 4695,2780 ; 4620.18,4031 4620.18,4123 ; 4620.18,4263.28 4620.18,4206.82 4642,4185 4674,4185 v1(4716,4227) ; v1@4707,4225 v1@4711,4221 ; 4714,4446 v1(4769,4446) ; v1@4716,4216 v1@4711,4221 ; v1@4716.5,4226.5 v1@4711,4221 ; v1(4720,2380) 4680,2420 4680,2525 4713.82,2558.82 4776.1,2558.82 ; v1(4735,2460) 4735,2515 4750,2530 ; 4776.1,2584.41 4830.59,2584.41 4850,2565 4850,2370 4805,2325 ; 4776.1,2610 4883,2610
  Top Layer w18: 2112.18,3271 2112.18,3216.82 v2(2205,3124) ; 2112.18,4771 2112.18,4716.82 v2(2205,4624) ; 3809,4022.18 3863.18,4022.18 v2(3956,4115)
  Top Layer w20: v1(1221,3116) 1221,3170 1248,3197 ; v1(1221,4616) 1221,4670 1248,4697 ; 1221.63,2841.55 1221.63,2914.63 1235,2928 1388,2928 1421,2961 1521,2961 ; 1221.63,4341.55 1221.63,4414.63 1235,4428 1388,4428 1421,4461 1521,4461 ; 1300.37,2660.45 1400.45,2660.45 1401,2661 ; 1300.37,4160.45 1400.45,4160.45 1401,4161 ; 1311,3031 1311,3169 1347,3205 ; 1311,4531 1311,4669 1347,4705 ; 1400,1700 1400,1865 ; v1(1401,2491) 1401,2571 ; v1(1401,3991) 1401,4071 ; 1415,2662 1451,2698 ; 1415,4162 1451,4198 ; v1(1420,1503) 1420,1340 1480,1280 1600,1280 ; 1451,2771 1451,2698 ; 1451,4271 1451,4198 ; 1521,3051 1634,3051 1655,3072 1997,3072 2234,2835 2717,2835 2801,2751 2881,2751 ; 1521,4551 1634,4551 1655,4572 1997,4572 2234,4335 2717,4335 2801,4251 2881,4251 ; v1(1525,1340) 1525,1385 1540,1400 1610,1400 1610,1410 ; v1(1525,1465) 1565,1465 1610,1510 ; 1526,2746 1478,2698 1451,2698 ; 1526,4246 1478,4198 1451,4198 ; 1559,2827 1566,2820 1609,2820 1619.26,2809.74 1691.26,2809.74 1761,2740 1761,2731 ; 1559,4327 1566,4320 1609,4320 1619.26,4309.74 1691.26,4309.74 1761,4240 1761,4231 ; 1611,3401 1670,3342 1754,3342 1805,3393 ; 1611,4901 1670,4842 1754,4842 1805,4893 ; v1(1680,2951) 1715,2986 1901,2986 ; v1(1680,4451) 1715,4486 1901,4486 ; v1@1693,2689 v1(1693,2690) ; v1@1693,4189 v1(1693,4190) ; v1@1694,2688 1725,2657 1902,2657 1924,2635 1924,2428 1941,2411 v4(1941,2311) ; v1@1694,4188 1725,4157 1902,4157 1924,4135 1924,3928 1941,3911 v4(1941,3811) ; 1698,1522 1700,1520 ; 1698,1863 1700,1865 ; v1(1733,3126) 2022,3126 2198,2950 v1(2355,2950) ; v1(1733,4626) 2022,4626 2198,4450 v1(2355,4450) ; 1801,2911 1735,2911 1723,2899 1662,2899 v1(1610,2951) 1688,3029 1975,3029 2211,2793 2659,2793 2801,2651 2881,2651 ; 1801,4411 1735,4411 1723,4399 1662,4399 v1(1610,4451) 1688,4529 1975,4529 2211,4293 2659,4293 2801,4151 2881,4151 ; 1823.83,3398.17 1953.72,3398.17 ; 1823.83,4898.17 1953.72,4898.17 ; 1851,2731 1931,2731 v2(1996,2666) ; 1851,4231 1931,4231 v2(1996,4166) ; 1901,2911 1901,2986 ; 1901,4411 1901,4486 ; 2001,2571 2096,2571 2121,2546 2121,2516 ; 2001,4071 2096,4071 2121,4046 2121,4016 ; 2080,1700 2080,1865 ; v1(2100,1503) 2100,1340 2160,1280 2280,1280 ; v1(2205,1340) 2205,1385 2220,1400 2290,1400 2290,1410 ; v1(2205,1465) 2245,1465 2290,1510 ; v1(2213,2667) 2213,2459.82 2213,2349 v1(2288,2274) ; v1(2213,4167) 2213,3959.82 2213,3849 v1(2288,3774) ; 2378,1522 2380,1520 ; 2378,1863 2380,1865 ; 2760,1700 2760,1865 ; v1(2780,1503) 2780,1340 2840,1280 2960,1280 ; 2881,2551 2809,2551 2606,2754 2183,2754 1951,2986 1901,2986 ; 2881,4051 2809,4051 2606,4254 2183,4254 1951,4486 1901,4486 ; v1(2885,1340) 2885,1385 2900,1400 2970,1400 2970,1410 ; v1(2885,1465) 2925,1465 2970,1510 ; 3058,1522 3060,1520 ; 3058,1863 3060,1865 ; 3320,2615 3320,2780 ; v1(3340,2418) 3340,2255 3400,2195 3520,2195 ; 3440,1700 3440,1865 ; v1(3445,2255) 3445,2300 3460,2315 3530,2315 3530,2325 ; v1(3445,2380) 3485,2380 3530,2425 ; v1(3460,1503) 3460,1340 3520,1280 3640,1280 ; v1(3565,1340) 3565,1385 3580,1400 3650,1400 3650,1410 ; v1(3565,1465) 3605,1465 3650,1510 ; 3618,2437 3620,2435 ; 3618,2778 3620,2780 ; 3679,3521 3738,3580 3738,3664 3687,3715 ; 3681.83,3733.83 3681.83,3863.72 ; 3738,1522 3740,1520 ; 3738,1863 3740,1865 ; 3875,3257 3911,3221 4049,3221 ; 3883,3158 3910,3131 v1(3964,3131) ; v1(3954,3643) 3954,3932 4130,4108 v1(4130,4265) ; 3960,2615 3960,2780 ; v1(3980,2418) 3980,2255 4040,2195 4160,2195 ; 4029,3431 4029,3544 4008,3565 4008,3907 4245,4144 4245,4627 4329,4711 4329,4791 ; v1(4085,2255) 4085,2300 4100,2315 4170,2315 4170,2325 ; v1(4085,2380) 4125,2380 4170,2425 ; 4110,1700 4110,1865 ; 4119,3431 4119,3331 4152,3298 4152,3145 4165.37,3131.63 4238.45,3131.63 ; v1(4129,3590) 4094,3625 4094,3811 ; v1(4130,1503) 4130,1340 4190,1280 4310,1280 ; 4169,3711 4169,3645 4181,3633 4181,3572 v1(4129,3520) 4051,3598 4051,3885 4287,4121 4287,4569 4429,4711 4429,4791 ; 4169,3811 4094,3811 ; v1(4235,1340) 4235,1385 4250,1400 4320,1400 4320,1410 ; v1(4235,1465) 4275,1465 4320,1510 ; 4253,3469 4260,3476 4260,3519 4270.26,3529.26 4270.26,3601.26 4340,3671 4349,3671 ; 4258,2437 4260,2435 ; 4258,2778 4260,2780 ; 4309,3361 4382,3361 ; 4334,3436 4382,3388 4382,3361 ; 4349,3761 4349,3841 v2(4414,3906) ; v1(4390,3603) v1@4391,3603 ; v1@4392,3604 4423,3635 4423,3812 4445,3834 4652,3834 4669,3851 v4(4769,3851) ; 4408,1522 4410,1520 ; 4408,1863 4410,1865 ; v1(4413,4123) 4620.18,4123 4731,4123 v1(4806,4198) ; 4418,3325 4382,3361 ; 4419,3311 4419.55,3310.45 4419.55,3210.37 ; 4509,3311 v1(4589,3311) ; 4509,3911 4509,4006 4534,4031 4564,4031 ; 4529,4791 4529,4719 4326,4516 4326,4093 4094,3861 4094,3811 ; 4595,2615 4595,2780 ; v1(4615,2418) 4615,2255 4675,2195 4795,2195 ; v1(4720,2255) 4720,2300 4735,2315 4805,2315 4805,2325 ; v1(4720,2380) 4760,2380 4805,2425 ; 4893,2437 4895,2435 ; 4893,2778 4895,2780
  Top Layer w25: v2(1354,3364) 1427,3291 1494,3291 1601,3184 ; v2(1354,4864) 1427,4791 1494,4791 1601,4684 ; 1421,3051 1421,3156.35 ; 1421,4551 1421,4656.35 ; 1698,1522 1698,1863 ; 1700,1280 1700,1400 1700,1520 ; 1801,2821 1901,2821 1963,2821 2058,2726 2058,2628 2001,2571 2001,2404 2043,2362 v4(2043,2195) ; 1801,4321 1901,4321 1963,4321 2058,4226 2058,4128 2001,4071 2001,3904 2043,3862 v4(2043,3695) ; 2043,2340 v1(2147,2340) ; 2043,3840 v1(2147,3840) ; v2(2205,3124) 2261,3180 2261,3291 ; v2(2205,4624) 2261,4680 2261,4791 ; 2378,1522 2378,1863 ; 2380,1280 2380,1400 2380,1520 ; 3058,1522 3058,1863 ; 3060,1280 3060,1400 3060,1520 ; 3618,2437 3618,2778 ; 3620,2195 3620,2315 3620,2435 ; v2(3716,3264) 3789,3337 3789,3404 3896,3511 ; 3738,1522 3738,1863 ; 3740,1280 3740,1400 3740,1520 ; 3789,4171 3900,4171 v2(3956,4115) ; 3923.65,3331 4029,3331 ; 4258,2437 4258,2778 ; 4259,3711 4259,3811 4259,3873 4354,3968 4452,3968 4509,3911 4676,3911 4718,3953 v4(4885,3953) ; 4260,2195 4260,2315 4260,2435 ; 4408,1522 4408,1863 ; 4410,1280 4410,1400 4410,1520 ; 4740,3953 v1(4740,4057) ; 4893,2437 4893,2778 ; 4895,2195 4895,2315 4895,2435
  Top Layer w30: 1521,2961 1522,2960 v2(1522,2896) 1591,2896 1631,2856 1717,2856 1752,2821 1801,2821 ; 1521,4461 1522,4460 v2(1522,4396) 1591,4396 1631,4356 1717,4356 1752,4321 1801,4321 ; 4119,3431 4120,3432 v2(4184,3432) 4184,3501 4224,3541 4224,3627 4259,3662 4259,3711
  Top Layer w40: 2261,3291 2261,3371 2301,3411 ; 2261,4791 2261,4871 2301,4911 ; 2441.54,3298 2483,3298 ; 2441.54,4798 2483,4798 ; v2(2681,3330) 2800,3330 ; v2(2681,4830) 2800,4830 ; v3(2686.51,3011) 2781,3011 ; v3(2686.51,4511) 2781,4511 ; 2781,3311 2800,3330 ; 2781,4811 2800,4830 ; 2801,3121.55 2801,3331 2800,3330 ; 2801,4621.55 2801,4831 2800,4830 ; 2802,3171 2911,3171 ; 2802,4671 2911,4671 ; 3669,4211 3709,4171 3789,4171 ; v2(3750,4591) 3750,4710 ; 3769,4691 3750,4710 ; 3782,4351.54 3782,4393 ; 3909,4712 3909,4821 ; 3958.45,4711 3749,4711 3750,4710 ; v3(4069,4596.51) 4069,4691
  Bottom Layer w10: 1253.07,1503.27 1254,1504.2 ; 1323.94,1503.27 1325,1504.33 ; 1933.07,1503.27 1934,1504.2 ; 1953.72,3290.69 1965.53,3278.87 ; 1953.72,4790.69 1965.53,4778.87 ; 2003.94,1503.27 2005,1504.33 ; 2217.68,2251.32 2237.68,2251.32 ; 2217.68,3751.32 2237.68,3751.32 ; 2613.07,1503.27 2614,1504.2 ; 2658,2626.27 2661,2629.27 ; 2658,4126.27 2661,4129.27 ; 2683.94,1503.27 2685,1504.33 ; 3173.07,2418.27 3174,2419.2 ; 3243.94,2418.27 3245,2419.33 ; 3293.07,1503.27 3294,1504.2 ; 3363.94,1503.27 3365,1504.33 ; 3789.31,3863.72 3801.13,3875.53 ; 3813.07,2418.27 3814,2419.2 ; 3883.94,2418.27 3885,2419.33 ; 3963.07,1503.27 3964,1504.2 ; 4033.94,1503.27 4035,1504.33 ; 4448.07,2418.27 4449,2419.2 ; 4450.73,4571 4453.73,4568 ; 4518.94,2418.27 4520,2419.33 ; 4828.68,4127.68 4828.68,4147.68
  Bottom Layer w15: 2101,2983 2101,3020 ; 2101,4483 2101,4520 ; 2117.68,2431.32 2100,2413.64 2100,2295 2143.68,2251.32 2217.68,2251.32 ; 2117.68,3931.32 2100,3913.64 2100,3795 2143.68,3751.32 2217.68,3751.32 ; 2217.68,2341.32 2224,2335 2288,2335 v1(2317,2364) 2367.68,2313.32 2367.68,2311.32 ; 2217.68,3841.32 2224,3835 2288,3835 v1(2317,3864) 2367.68,3813.32 2367.68,3811.32 ; v1(2288,2274) 2307,2255 2557,2255 2621,2191 ; v1(2288,3774) 2307,3755 2557,3755 2621,3691 ; 2458,2311 v1(2536,2311) 2611,2311 ; 2458,3811 v1(2536,3811) 2611,3811 ; 4060,4011 4097,4011 ; 4648.68,4027.68 4666.36,4010 4785,4010 4828.68,4053.68 4828.68,4127.68 ; 4738.68,4127.68 4745,4134 4745,4198 v1(4716,4227) 4766.68,4277.68 4768.68,4277.68 ; 4769,4368 v1(4769,4446) 4769,4521 ; v1(4806,4198) 4825,4217 4825,4467 4889,4531
  Bottom Layer w20: 1261,2593.2 1261,2467 1357,2371 1441,2371 ; 1261,3238.87 1261,3156 v1(1221,3116) 1473,3116 1497.22,3140.22 1497.22,3238.87 ; 1261,4093.2 1261,3967 1357,3871 1441,3871 ; 1261,4738.87 1261,4656 v1(1221,4616) 1473,4616 1497.22,4640.22 1497.22,4738.87 ; 1323.94,1283.27 1468.27,1283.27 v1(1525,1340) ; 1323.94,1393.27 1453.27,1393.27 v1(1525,1465) ; 1323.94,1503.27 1324.2,1503 v1(1420,1503) 1462,1545 v1(1540,1545) ; 1339.74,2593.2 1339.74,2472.26 1375,2437 1475,2437 1541,2371 ; 1339.74,4093.2 1339.74,3972.26 1375,3937 1475,3937 1541,3871 ; v1(1401,2491) 1420,2510 1420,2591.68 1418.48,2593.2 ; v1(1401,3991) 1420,4010 1420,4091.68 1418.48,4093.2 ; 1497.22,2593.2 1497.22,2666.22 1520,2689 1693,2689 v1(1693,2690) ; 1497.22,4093.2 1497.22,4166.22 1520,4189 1693,4189 v1(1693,4190) ; 1575.96,2593.2 1575.96,2505.04 1641,2440 1641,2371 ; 1575.96,3238.87 1575.96,3063.04 1610,3029 v1@1610,2952 ; 1575.96,4093.2 1575.96,4005.04 1641,3940 1641,3871 ; 1575.96,4738.87 1575.96,4563.04 1610,4529 v1@1610,4452 ; 1641,2441 1784,2441 1813.68,2411.32 1877.68,2411.32 ; 1641,3941 1784,3941 1813.68,3911.32 1877.68,3911.32 ; 1654.7,3238.87 1654.7,3089.3 1680,3064 v1(1680,2951) ; 1654.7,4738.87 1654.7,4589.3 1680,4564 v1(1680,4451) ; v1(1733,3126) 1733,3238.43 1733.44,3238.87 ; v1(1733,4626) 1733,4738.43 1733.44,4738.87 ; 1733.44,2593.2 1734,2592.65 ; 1733.44,4093.2 1734,4092.65 ; 1967.68,2411.32 2021.68,2411.32 2041,2392 2041,2251 ; 1967.68,3911.32 2021.68,3911.32 2041,3892 2041,3751 ; 2003.94,1283.27 2148.27,1283.27 v1(2205,1340) ; 2003.94,1393.27 2133.27,1393.27 v1(2205,1465) ; 2003.94,1503.27 2004.2,1503 v1(2100,1503) 2142,1545 v1(2220,1545) ; v1(2053,2486) 2076.32,2509.32 2379.68,2509.32 2417.68,2471.32 2417.68,2362.32 2451.68,2328.32 ; v1(2053,3986) 2076.32,4009.32 2379.68,4009.32 2417.68,3971.32 2417.68,3862.32 2451.68,3828.32 ; v1(2147,2340) 2216.36,2340 ; v1(2147,3840) 2216.36,3840 ; v1(2213,2667) 2213,2800 2249,2836 2291,2836 ; v1(2213,4167) 2213,4300 2249,4336 2291,4336 ; v2(2237,3040) 2331,3040 ; v2(2237,4540) 2331,4540 ; 2237.68,2251.32 2298,2191 2361,2191 ; 2237.68,3751.32 2298,3691 2361,3691 ; 2291,2631 2291,2705 2315,2729 2455,2729 v2(2658,2526) 2701,2483 2701,2311 ; 2291,4131 2291,4205 2315,4229 2455,4229 v2(2658,4026) 2701,3983 2701,3811 ; 2341,2509.32 2341,2631 ; 2341,4009.32 2341,4131 ; v1(2355,2950) 2391,2914 2391,2836 ; v1(2355,4450) 2391,4414 2391,4336 ; 2391,2631 2391,2556 2462.68,2484.32 2462.68,2431.32 ; 2391,4131 2391,4056 2462.68,3984.32 2462.68,3931.32 ; 2421,3040 2421,2970 2441,2950 2441,2836 ; 2421,4540 2421,4470 2441,4450 2441,4336 ; 2441,2631 2441,2598 2533,2506 2575,2506 2631,2450 ; 2441,4131 2441,4098 2533,4006 2575,4006 2631,3950 ; v1(2567,2707) 2705,2707 2761,2651 2881,2651 ; v1(2567,4207) 2705,4207 2761,4151 2881,4151 ; 2637.68,2419.32 2637.68,2431.32 2637.68,2377.32 2656,2359 2656,2269 2734.32,2190.68 2960.32,2190.68 ; 2637.68,3919.32 2637.68,3931.32 2637.68,3877.32 2656,3859 2656,3769 2734.32,3690.68 2960.32,3690.68 ; 2683.94,1283.27 2828.27,1283.27 v1(2885,1340) ; 2683.94,1393.27 2813.27,1393.27 v1(2885,1465) ; 2683.94,1503.27 2684.2,1503 v1(2780,1503) 2822,1545 v1(2900,1545) ; 3243.94,2198.27 3388.27,2198.27 v1(3445,2255) ; 3243.94,2308.27 3373.27,2308.27 v1(3445,2380) ; 3243.94,2418.27 3244.2,2418 v1(3340,2418) 3382,2460 v1(3460,2460) ; 3363.94,1283.27 3508.27,1283.27 v1(3565,1340) ; 3363.94,1393.27 3493.27,1393.27 v1(3565,1465) ; 3363.94,1503.27 3364.2,1503 v1(3460,1503) 3502,1545 v1(3580,1545) ; 3841.13,3171 3924,3171 v1(3964,3131) 3964,3383 3939.78,3407.22 3841.13,3407.22 ; 3841.13,3485.96 4016.96,3485.96 4051,3520 v1@4128,3520 ; 3841.13,3564.7 3990.7,3564.7 4016,3590 v1(4129,3590) ; 3841.13,3643.44 3841.57,3643 v1(3954,3643) ; 3883.94,2198.27 4028.27,2198.27 v1(4085,2255) ; 3883.94,2308.27 4013.27,2308.27 v1(4085,2380) ; 3883.94,2418.27 3884.2,2418 v1(3980,2418) 4022,2460 v1(4100,2460) ; 4033.94,1283.27 4178.27,1283.27 v1(4235,1340) ; 4033.94,1393.27 4163.27,1393.27 v1(4235,1465) ; 4033.94,1503.27 4034.2,1503 v1(4130,1503) 4172,1545 v1(4250,1545) ; v2(4040,4147) 4040,4241 ; 4040,4331 4110,4331 4130,4351 4244,4351 ; v1(4130,4265) 4166,4301 4244,4301 ; 4244,4201 4244,4159 4280,4123 v1(4413,4123) ; v1(4373,4477) 4373,4615 4429,4671 4429,4791 ; v1(4390,3603) 4391,3603 4391,3430 4413.78,3407.22 4486.8,3407.22 ; 4449,4201 4375,4201 4351,4225 4351,4365 v2(4554,4568) 4597,4611 4769,4611 ; 4449,4251 4570.68,4251 ; 4449,4301 4524,4301 4595.68,4372.68 4648.68,4372.68 ; 4449,4351 4482,4351 4574,4443 4574,4485 4630,4541 ; 4486.8,3171 4613,3171 4709,3267 4709,3351 ; 4486.8,3249.74 4607.74,3249.74 4643,3285 4643,3385 4709,3451 ; 4486.8,3328.48 4488.31,3330 4570,3330 v1(4589,3311) ; 4486.8,3485.96 4574.96,3485.96 4640,3551 4709,3551 ; 4486.8,3643.44 4487.35,3644 ; 4518.94,2198.27 4663.27,2198.27 v1(4720,2255) ; 4518.94,2308.27 4648.27,2308.27 v1(4720,2380) ; 4518.94,2418.27 4519.2,2418 v1(4615,2418) 4657,2460 v1(4735,2460) ; v1(4594,3963) 4570.68,3986.32 4570.68,4289.68 4608.68,4327.68 4717.68,4327.68 4751.68,4361.68 ; 4639,3551 4639,3694 4668.68,3723.68 4668.68,3787.68 ; 4660.68,4547.68 4648.68,4547.68 4702.68,4547.68 4721,4566 4811,4566 4889.32,4644.32 4889.32,4870.32 ; 4668.68,3877.68 4668.68,3931.68 4688,3951 4829,3951 ; v1(4740,4057) 4740,4126.36 ; 4828.68,4147.68 4889,4208 4889,4271
  Bottom Layer w25: v2(1354,3364) 1780,3364 1812.18,3331.82 1812.18,3238.87 ; v2(1354,4864) 1780,4864 1812.18,4831.82 1812.18,4738.87 ; 1418.48,3238.87 1418.48,3356.48 ; 1418.48,4738.87 1418.48,4856.48 ; 1660,1670 1700,1710 1700,1865 ; v2(1734,2495) 1734,2592.65 ; v2(1734,3995) 1734,4092.65 ; 2101,3020 v2(2205,3124) ; 2101,4520 v2(2205,4624) ; 2168.28,3290.69 2168.28,3398.17 ; 2168.28,4790.69 2168.28,4898.17 ; 2263.35,2431.32 2372.68,2431.32 ; 2263.35,3931.32 2372.68,3931.32 ; 2340,1670 2380,1710 2380,1865 ; 2419,3040 2551,3040 ; 2419,4540 2551,4540 ; 2462.68,2431.32 2547.68,2431.32 ; 2462.68,3931.32 2547.68,3931.32 ; v2(2658,2526) 2658,2626.27 ; v2(2658,4026) 2658,4126.27 ; 2661,2771 v3@2661,2912 ; 2661,4271 v3@2661,4412 ; 3020,1670 3060,1710 3060,1865 ; 3580,2585 3620,2625 3620,2780 ; 3681.83,4078.28 3789.31,4078.28 ; 3700,1670 3740,1710 3740,1865 ; v2(3716,3264) 3716,3690 3748.18,3722.18 3841.13,3722.18 ; 3723.52,3328.48 3841.13,3328.48 ; v2(3956,4115) 4060,4011 ; 4040,4329 4040,4461 ; v3@4168,4571 4309,4571 ; 4220,2585 4260,2625 4260,2780 ; 4370,1670 4410,1710 4410,1865 ; 4453.73,4568 v2(4554,4568) ; 4487.35,3644 v2(4585,3644) ; 4648.68,4173.35 4648.68,4282.68 ; 4648.68,4372.68 4648.68,4457.68 ; 4855,2585 4895,2625 4895,2780
  Bottom Layer w30: v2(1996,2666) 2080,2666 ; v2(1996,4166) 2080,4166 ; 2216.36,2340 2217.68,2341.32 ; 2216.36,3840 2217.68,3841.32 ; 2778,2904 3001,2904 3001,2378 2974,2351 2881,2351 ; 2778,4404 3001,4404 3001,3878 2974,3851 2881,3851 ; 4176,4688 4176,4911 4702,4911 4729,4884 4729,4791 ; v2(4414,3906) 4414,3990 ; 4738.68,4127.68 4740,4126.36
  Bottom Layer w35: 1953.72,3398.17 2168.28,3398.17 ; 1953.72,4898.17 2168.28,4898.17 ; 1965.53,3278.87 2156.47,3278.87 ; 1965.53,4778.87 2156.47,4778.87 ; 3681.83,3863.72 3681.83,4078.28 ; 3801.13,3875.53 3801.13,4066.47
  Bottom Layer w40: v2(1522,2896) 1562,2856 1707,2856 1794,2943 1794,3135 1812.18,3153.18 1812.18,3238.87 1870.13,3238.87 1924,3185 2499,3185 2575,3109 ; v2(1522,4396) 1562,4356 1707,4356 1794,4443 1794,4635 1812.18,4653.18 1812.18,4738.87 1870.13,4738.87 1924,4685 2499,4685 2575,4609 ; 1733.44,2593.2 1812.18,2593.2 ; 1733.44,4093.2 1812.18,4093.2 ; 2505.09,3311 2524.09,3330 v2(2681,3330) ; 2505.09,4811 2524.09,4830 v2(2681,4830) ; 2819.68,3272 2865,3272 2964,3371 ; 2819.68,4772 2865,4772 2964,4871 ; 3709,4874 3808,4775 3808,4729.69 ; v2(3750,4591) 3750,4434.09 3769,4415.09 ; 3971,4485 3895,4409 3895,3834 3841.13,3780.13 3841.13,3722.18 3926.82,3722.18 3945,3704 4137,3704 4224,3617 4224,3472 v2(4184,3432) ; 4486.8,3643.44 4486.8,3722.18
  other v3: 2658.95,2892.89 2623.52,2948.01 2686.51,2948.01 2623.52,3011 2623.52,3073.99 2686.51,3073.99 2658.95,3129.11 2658.95,4392.89 2623.52,4448.01 2686.51,4448.01 2623.52,4511 4006.01,4533.52 4069,4533.52 4131.99,4533.52 3950.89,4568.95 4187.11,4568.95 2623.52,4573.99 2686.51,4573.99 4006.01,4596.51 4131.99,4596.51 2658.95,4629.11
  other v4: 1841,2195 1841,3695 4885,3751

## Polygon pours and split planes (outlines as drawn)
no net on Top Layer "Bottom Layer-No Net" (solid, pour order 1000): 3598,3050 3598,4992 4960,4992 4960,3050 3598,3050
no net on Top Layer "Bottom Layer-No Net" (solid, pour order 1000): 1140,3482 3082,3482 3082,2120 1140,2120 1140,3482
no net on Top Layer "Bottom Layer-No Net" (solid, pour order 1000): 1140,4982 3082,4982 3082,3620 1140,3620 1140,4982
no net on Bottom Layer "Bottom Layer-No Net" (solid, pour order 1007): 3760,2100 3760,2880 4360,2880 4360,2100 3760,2100
no net on Bottom Layer "Bottom Layer-No Net" (solid, pour order 1006): 3120,2100 3120,2880 3720,2880 3720,2100 3120,2100
no net on Bottom Layer "Bottom Layer-No Net" (solid, pour order 1005): 4395,2100 4395,2880 4995,2880 4995,2100 4395,2100
no net on Bottom Layer "Bottom Layer-No Net" (solid, pour order 1004): 3910,1185 3910,1965 4510,1965 4510,1185 3910,1185
no net on Bottom Layer "Bottom Layer-No Net" (solid, pour order 1003): 2560,1185 2560,1965 3160,1965 3160,1185 2560,1185
no net on Bottom Layer "Bottom Layer-No Net" (solid, pour order 1002): 3240,1185 3240,1965 3840,1965 3840,1185 3240,1185
no net on Bottom Layer "Bottom Layer-No Net" (solid, pour order 1001): 1880,1185 1880,1965 2480,1965 2480,1185 1880,1185
no net on Bottom Layer "Bottom Layer-No Net" (solid, pour order 1000): 1200,1185 1200,1965 1800,1965 1800,1185 1200,1185

## Other copper
Top Layer:
  region: 3628,3805 3628,4147 3596,4147 3596,3805
  region: 3871,3912 3871,3928 3823,3928 3823,3912
  region: 3783,3912 3783,3928 3735,3928 3735,3912
  rectangle: 2002,3297 2018,3345
  rectangle: 2002,3209 2018,3257
  rectangle: 1895,3452 2237,3484
  rectangle: 1895,4952 2237,4984
  rectangle: 2002,4709 2018,4757
  rectangle: 2002,4797 2018,4845

## Silkscreen, mask and mechanical layers (free items; w line width, h text height)
Mechanical 1:
  lines w10: 1100,1100 5040,1100 5040,5040 1100,5040 1100,1100 ; 1141,2121 3081,2121 3081,3481 1141,3481 1141,2121 ; 1141,3621 1141,4981 3081,4981 3081,3621 1141,3621 ; 1200,1185 1800,1185 1800,1965 1200,1965 1200,1185 ; 1880,1185 1880,1965 2480,1965 2480,1185 1880,1185 ; 2560,1185 2560,1965 3160,1965 3160,1185 2560,1185 ; 3120,2100 3720,2100 3720,2880 3120,2880 3120,2100 ; 3240,1185 3840,1185 3840,1965 3240,1965 3240,1185 ; 3599,3051 4959,3051 4959,4991 3599,4991 3599,3051 ; 3760,2100 3760,2880 4360,2880 4360,2100 3760,2100 ; 3910,1185 3910,1965 4510,1965 4510,1185 3910,1185 ; 4395,2100 4995,2100 4995,2880 4395,2880 4395,2100

## Text inside footprints (layer, text, board x,y; h text height)
Wi-Fi1: Bottom Overlay "Wi-Fi" at 1278,2827 h100 r180
Wi-Fi1: Bottom Overlay "Wi-Fi" at 4253,3188 h100 r270
Wi-Fi1: Bottom Overlay "Wi-Fi" at 1278,4327 h100 r180